# Altium PCB PCB.PcbDoc (part 2 of 2)
Units mm, origin at the board's own origin, x right, y up, seen from the top; angles counter-clockwise.
Board outline 135 x 105 mm, 2 copper layers (Top Layer, Bottom Layer); 93 components, 49 nets, 259 pads, 11 vias.
Unrouted connection lines stored in the file: 35.
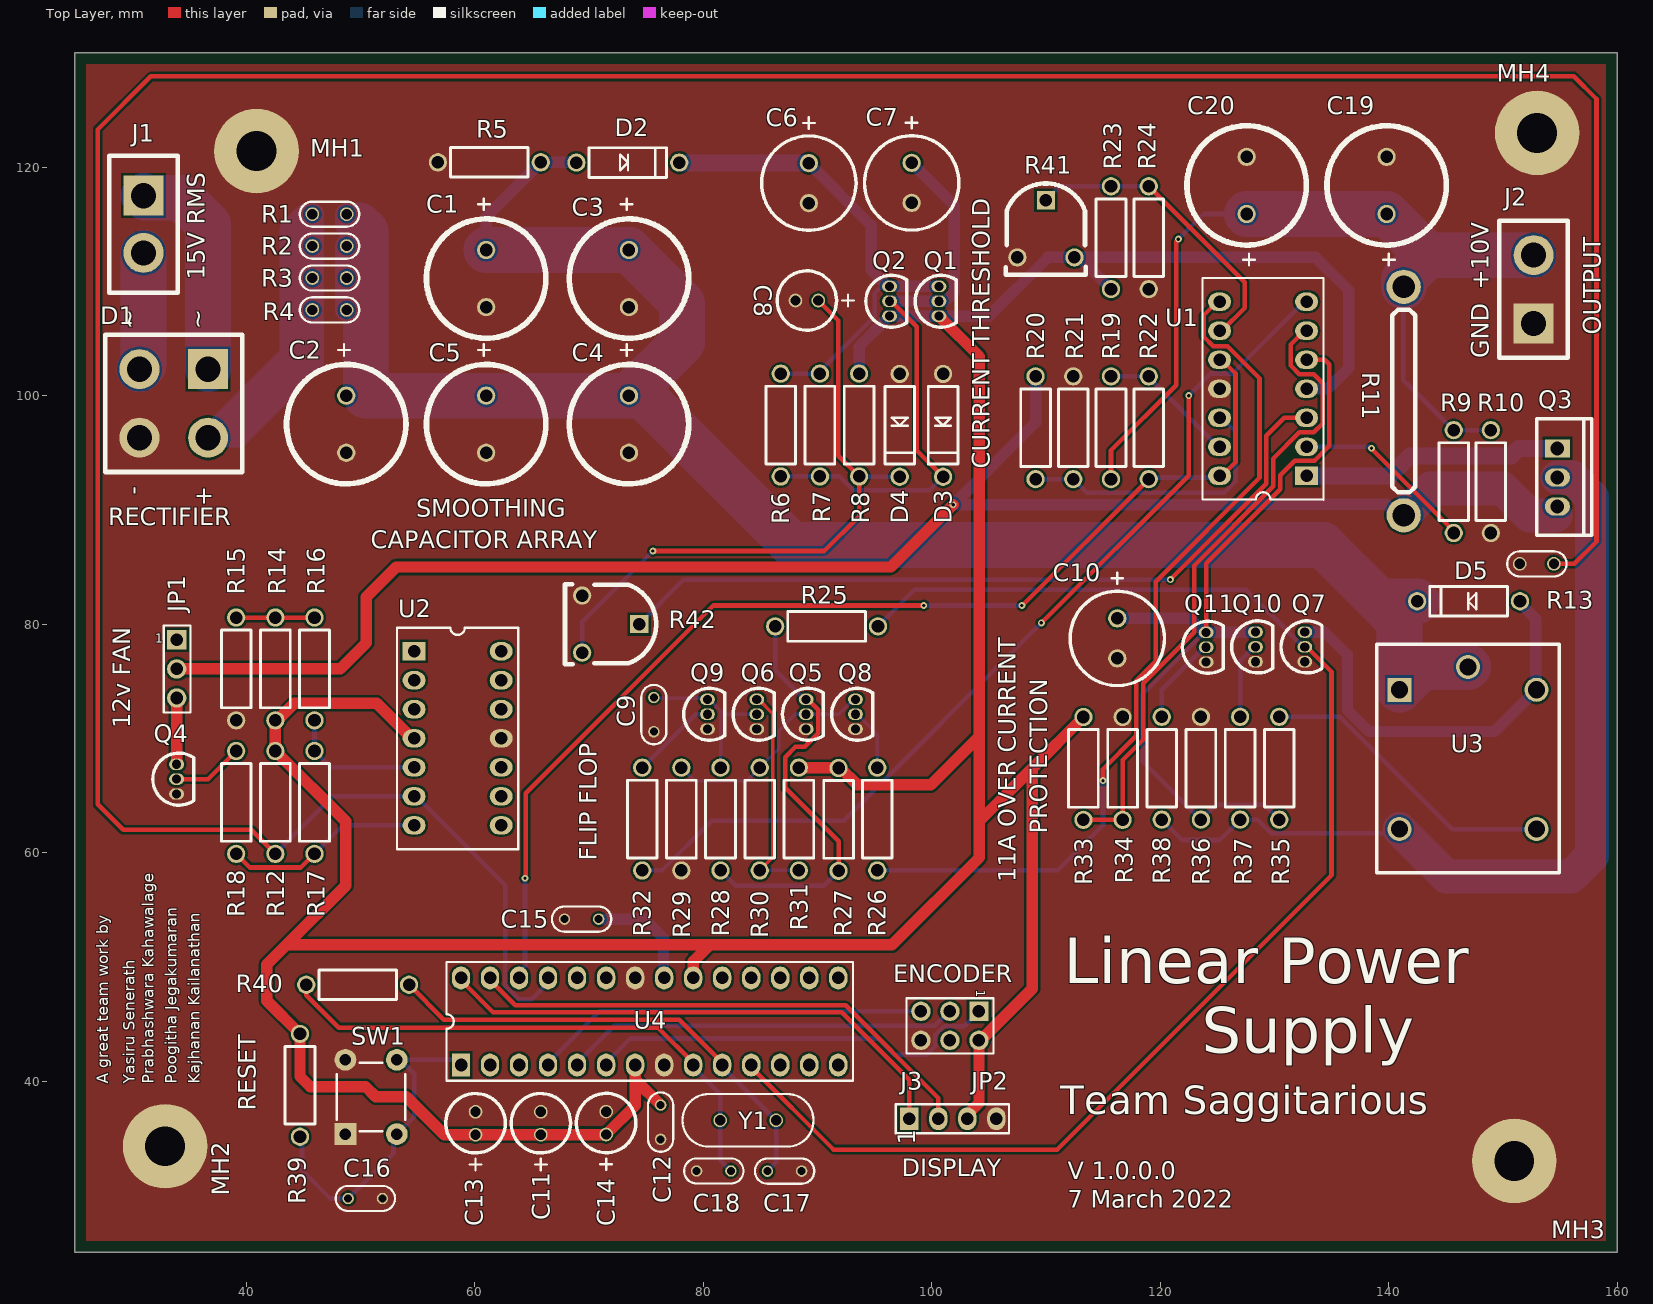
[diagram p0: Top Layer view]

## Part data (continued)
Y1: "Crystal 16MHz ±20ppm (Tol) ±30ppm (Stability) 18pF FUND 50Ohm 2-Pin Mini-CSMD T/R", Case/Package=CSMD, ESR (Equivalent Series Resistance)=50R, Frequency=16MHz, Frequency Stability=30ppm, Frequency Tolerance=20ppm, Load Capacitance=18pF, Manufacturer=Abracon, Max Operating Temperature=85°C, Min Operating Temperature=-40°C, Package Quantity=1000, Resistor Type=Ceramic, Supplier Part Number 1=1710290, Category=Crystals, ComponentLink1Description=https://datasheet.ciiva.com/15116/getdatasheetpartid-721624-15116835.pdf?src-supplier=Verical, ComponentLink1URL=https://datasheet.ciiva.com/15116/getdatasheetpartid-721624-15116835.pdf?src-supplier=Verical, ComponentLink2Description=https://datasheet.ciiva.com/22658/947971-22658293.pdf?src-supplier=Element14, ComponentLink2URL=https://datasheet.ciiva.com/22658/947971-22658293.pdf?src-supplier=Element14, ComponentLink3Description=https://datasheet.ciiva.com/5788/abm7-5788054.pdf?src-supplier=Farnell, ComponentLink3URL=https://datasheet.ciiva.com/5788/abm7-5788054.pdf?src-supplier=Farnell, ComponentLink4Description=https://datasheet.ciiva.com/7998/947971-7998600.pdf?src-supplier=Element14, ComponentLink4URL=https://datasheet.ciiva.com/7998/947971-7998600.pdf?src-supplier=Element14, ComponentLink5Description=https://datasheet.ciiva.com/46385/947971-46385243.pdf?src-supplier=Element14, ComponentLink5URL=https://datasheet.ciiva.com/46385/947971-46385243.pdf?src-supplier=Element14, ComponentLink6Description=https://datasheet.ciiva.com/16383/abm7-16383174.pdf?src-supplier=Future+Electronics, ComponentLink6URL=https://datasheet.ciiva.com/16383/abm7-16383174.pdf?src-supplier=Future+Electronics, ComponentLink7Description=https://datasheet.ciiva.com/18649/abm7-18649865.pdf?src-supplier=Digi-Key, ComponentLink7URL=https://datasheet.ciiva.com/18649/abm7-18649865.pdf?src-supplier=Digi-Key, ComponentLink8Description=https://datasheet.ciiva.com/18649/abm7-18649866.pdf?src-supplier=Digi-Key, ComponentLink8URL=https://datasheet.ciiva.com/18649/abm7-18649866.pdf?src-supplier=Digi-Key, ComponentLink9Description=https://datasheet.ciiva.com/18649/abm7-18649867.pdf?src-supplier=Digi-Key, ComponentLink9URL=https://datasheet.ciiva.com/18649/abm7-18649867.pdf?src-supplier=Digi-Key, ComponentLink10Description=https://datasheet.ciiva.com/26941/getdatasheetpartid-719818-26941724.pdf?src-supplier=Verical, ComponentLink10URL=https://datasheet.ciiva.com/26941/getdatasheetpartid-719818-26941724.pdf?src-supplier=Verical, Depth=3.5mm, Height=0.055inch, Lead Free="Lead Free", Length=6mm, Manufacturer Part Number=ABM7-16.000MHZ-D2Y-T, Mount="Surface Mount", Number of Pins=2, Packaging="Tape and Reel", Pricing 1="1000=0.52200, 3000=0.50800 (USD)", Radiation Hardening=No, REACH SVHC=Unknown, RoHS=Yes, Stock 1=710, Supplier 1=RSComponents, Termination=SMD/SMT, Tolerance=20ppm, Width=3.3mm

## Via types
v1: diameter 0.6, hole 0.3, Top Layer to Bottom Layer, 11 vias

## Nets (pads, with @x,y where several pads share a name; then routed paths per layer and width w, separated by ;. In a path a pad name is that pad's centre, name@x,y a point inside that pad or via, vN(x,y) a via of type N, cw(c..) or ccw(c..) an arc to the next point about the centre after c; other vN are vias at no path point)
10V_MOSFET: JP1.2 Q3.3 R11.2 R20.1 | length 145.6
  Top Layer w1: JP1.2 48.223,76.073 50.5,78.35 50.5,82.375 53.125,85 96.425,85 v1(101.875,90.45)
  Bottom Layer w1: v1(101.875,90.45) v1@101.9,90.45 ; R20.1 109.095,97.645 v1@101.9,90.45 ; R11.2 140.784,89.525 139.809,90.5 126.5,90.5 126.45,90.45 v1@101.9,90.45
  Bottom Layer w3: R11.2 143.675,91.875 149.975,91.875 152.35,89.5 154.6,89.5
10V_out: C19.1 C20.1 J2.1 R9.1 R10.1 R11.1 R19.1 | length 78.3
  Top Layer w0.4: R19.1 115.699,95.206 121.4,100.907 121.4,113.5 v1(121.6,113.7)
  Bottom Layer w0.4: v1(121.6,113.7) 123.8,115.9 C20.1 ; R11.1 141.3,109.5 141.3,101.334 141.534,101.1 141.575,101.1 R9.1 R10.1
  Bottom Layer w4: C20.1 C19.1 143.425,112.3 ; R11.1 141.325,110.2 143.425,112.3 ; J2.1 143.425,112.3
CurrentM: R22.1 U1.10 U1.14 U4.26 | length 100.3
  Top Layer w0.4: v1(64.4,57.75) 64.45,57.8 64.45,65.2 80.875,81.625 v1(99.3,81.625) ; v1(107.9,81.625) 107.937,81.625 R22.1 ; U1.14 125.4,92.975 126.6,94.175 126.6,101.935 125.4,103.135 U1.10
  Bottom Layer w0.4: U4.26 63.881,49.547 64.475,50.141 64.475,50.425 64.4,50.5 v1(64.4,57.75) ; v1(99.3,81.625) v1(107.9,81.625) ; R22.1 119.144,92.832 125.057,92.832 U1.14
FFC1: C9.2 Q6.2 Q9.3 R28.2 | length 14.6
  Bottom Layer w0.3: C9.2 75.761,73.492 80.29,73.492 Q9.3 80.525,73.407 81.518,72.414 ; R28.2 81.518,72.414 ; Q6.2 81.825,72.107 81.518,72.414
FFC2: Q5.2 Q8.3 R29.2 R30.2 | length 19.6
  Bottom Layer w0.3: R29.2 79.239,66.283 83.797,66.283 R30.2 86.6,69.086 86.6,70.65 88.057,72.107 Q5.2 91.879,72.107 93.179,73.407 Q8.3
GND: C1.2 C2.2 C3.2 C4.2 C5.2 C6.2 C7.2 C8.2 C9.1 C10.2 C11.2 C12.1 C13.2 C14.2 C15.1 C16.1 C17.2 C18.2 C19.2 C20.2 D1.1 D3.2 D4.2 J2.2 J3.6 JP2.4 MH1.1 MH2.1 MH3.1 MH4.1 Q4.1 Q5.1 Q6.1 Q7.1 Q8.1 Q9.1 Q10.1 Q11.1 R5.2 R10.2 R13.1 R15.2 R21.2 R24.1 R29.1 R34.1 R36.1 R41.2 R42.2 SW1.1 SW1.2 U1.11 U2.11 U4.8 U4.22
MainDC: C1.1 C2.1 C3.1 C4.1 C5.1 D2.2 D5.1 R1.2 R2.2 R3.2 R4.2 R5.1 U3.1 U3.5 | length 178.4
  Bottom Layer w1: C1.1 61,115.65 R5.1 65.787,120.412 68.888,120.412 D2.2
  Bottom Layer w2: R4.2 R3.2 R2.2 ; 48.786,114.925 R1.2
  Bottom Layer w4: 49.9,114.925 50.45,114.375 50.45,100 C5.1 C4.1 ; C1.1 C3.1 78.15,108.1 78.15,104.65 C4.1 ; D5.1 139.175,82 ; U3.5 142.95,76.25 U3.1 140.95,80.225 139.175,82 ; C4.1 74.725,100 87.8,86.925 134.25,86.925 139.175,82
MainDC_RELAY: Q3.2 R37.2 R38.2 U3.4 | length 77.4
  Bottom Layer w0.4: R38.2 121.924,61.1 125.218,61.1 R37.2 128.525,62.882 129.725,61.682 140.122,61.682 140.49,62.05 U3.4
  Bottom Layer w2.95: Q3.2 156.071,92.84
  Bottom Layer w3: U3.4 145.1,57.9 155.975,57.9 157.8,59.725 157.8,91.111 156.071,92.84
NetC6_1: C6.1 D2.1 Q1.3 Q2.3 R6.1 R7.1 | length 43.5
  Bottom Layer w0.4: R6.1 R7.1 90.217,102.138 95,106.921 95,108.966 95.481,109.446 96.198,109.446 Q2.3
  Bottom Layer w1: C6.1 94.7,114.9 94.7,111.024 96.163,109.561 Q2.3 Q1.3
  Bottom Layer w1.5: D2.1 77.927,120.4 77.977,120.35 C6.1
NetC7_1: C7.1 D3.1 Q1.2 Q2.2 R6.2 R7.2 | length 51.5
  Top Layer w0.4: Q2.2 96.463,108.261 98.708,106.016 98.708,95.192 D3.1
  Bottom Layer w0.4: R6.2 R7.2 91.949,92.924 93.173,91.7 99.8,91.7 D3.1
  Bottom Layer w1: Q2.2 Q1.2 101.178,108.261 101.981,109.064 101.981,116.644 C7.1
NetC8_1: C8.1 D4.1 R8.2 R42.3 | length 54.7
  Top Layer w0.4: v1(75.6,86.4) 90.6,86.4 93.646,89.446 R8.2 91.822,94.748 91.822,106.578 C8.1
  Bottom Layer w0.4: R42.3 69.4,80.2 v1(75.6,86.4) ; R8.2 93.658,92.912 97.188,92.912 D4.1
NetC15_2: C15.2 U4.21 | length 10.1
  Bottom Layer w1: C15.2 74.85,54.175 76.525,52.5 76.525,49.078 U4.21 U4.21@76.581,49.222
NetC16_2: C16.2 R39.1 SW1.3 SW1.4 U4.1 | length 28.9
  Bottom Layer w0.4: R39.1 44.875,34.953 44.875,32.175 47.332,29.718 C16.2 52.89,33.689 52.89,35.071 SW1.3 54.7,36.881 54.7,40.641 SW1.4@53.483,41.858 ; SW1.4 SW1.4@53.483,41.858 ; U4.1 58.345,41.858 SW1.4@53.483,41.858
NetC17_1: C17.1 R40.2 U4.10 Y1.2 | length 42
  Top Layer w0.4: R40.2 57.3,45.375 77.888,45.375 81.661,41.602 U4.10
  Bottom Layer w0.4: U4.10 81.661,41.242 86.344,36.559 Y1.2 86.383,32.908 85.621,32.146 C17.1
NetC18_1: C18.1 R40.1 U4.9 Y1.1 | length 48.1
  Top Layer w0.4: R40.1 45.25,47.525 48.097,44.678 76.045,44.678 79.121,41.602 U4.9
  Bottom Layer w0.4: U4.9@79.15,41.373 U4.9 79.121,41.202 81.483,38.84 Y1.1 81.483,33.067 C18.1
NetD1_3: D1.3 R1.1 R2.1 R3.1 R4.1 | length 48.3
  Bottom Layer w2: D1.3 D1.3@36.791,96.45 ; D1.3@36.791,96.45 43.925,103.584 43.925,114.55 45.259,115.884 R1.1 R2.1 R3.1 R4.1 45.786,102.961 39.275,96.45 D1.3@36.791,96.45
NetD5_2: D5.2 Q7.3 U3.2 | length 36.6
  Bottom Layer w1: Q7.3 134.398,79.302 136.4,77.3 136.4,72.486 138.286,70.6 149.3,70.6 U3.2 152.9,74.3 152.9,80.438 151.5,81.838 D5.2
NetJ3_1: J3.1 U4.6 | length 36.7
  Top Layer w0.4: U4.6 U4.6@71.501,41.602
  Bottom Layer w0.4: U4.6 71.501,41.602 73.624,43.725 95.325,43.725 96.739,42.311 99.578,42.311 100.33,43.063 100.33,44.059 101.082,44.811 102.85,44.811 J3.1
NetJ3_3: J3.3 U4.5 | length 34.7
  Bottom Layer w0.4: U4.5 68.961,41.602 72.21,44.851 100.274,44.851 101.524,46.101 J3.3
NetJ3_5: J3.5 U4.4 | length 34.7
  Bottom Layer w0.4: U4.4 66.421,41.602 70.92,46.101 J3.5
NetJP1_3: JP1.3 Q4.3 | length 5.8
  Top Layer w1: Q4.3 33.909,67.725 JP1.3
NetJP2_1: JP2.1 U4.28 | length 46.5
  Top Layer w0.4: U4.28 58.801,48.822 61.598,46.025 92.125,46.025 98.05,40.1 98.05,36.709 JP2.1
NetJP2_2: JP2.2 U4.27 | length 45.5
  Top Layer w0.4: U4.27 61.341,48.822 63.538,46.625 92.475,46.625 100.584,38.516 JP2.2
NetQ3_1: Q3.1 U1.1 | length 23
  Bottom Layer w1.5: U1.1 140.125,92.975 141.875,94.725 150.74,94.725 151.395,95.38 Q3.1
NetQ4_2: Q4.2 R18.2 | length 6.2
  Top Layer w0.4: Q4.2 36.652,66.425 R18.2
NetQ5_3: Q5.3 R25.1 R27.1 R28.1 | length 38.2
  Top Layer w0.4: Q5.3 89.161,73.407 90.061,72.507 90.061,70.434 88.877,69.25 88.075,69.25 87.176,68.351 87.176,65.664 91.85,60.99 R27.1
  Bottom Layer w0.4: R28.1 82.851,57.1 90.55,57.1 R27.1 ; R25.1 86.3,75.968 88.861,73.407 Q5.3
NetQ6_3: Q6.3 R30.1 R31.1 | length 19.5
  Top Layer w0.3: Q6.3 84.843,73.407 86.097,72.153 86.097,59.583 R30.1
  Bottom Layer w0.3: R30.1 R31.1
NetQ8_2: Q8.2 R26.1 | length 5.6
  Bottom Layer w0.3: Q8.2 93.479,72.107 95.234,70.352 R26.1
NetQ9_2: Q9.2 R32.1 | length 7.7
  Bottom Layer w0.4: R32.1 79.334,72.107 Q9.2
NetQ10_2: Q10.2 R37.1 | length 6.8
  Bottom Layer w0.4: R37.1 127,76.807 128.195,78.002 Q10.2
NetQ11_2: Q11.2 R38.1 | length 7.8
  Bottom Layer w0.4: R38.1 120.142,74.237 123.877,77.972 Q11.2
NetR9_2: R9.2 U1.2 | length 16.3
  Top Layer w0.4: v1(138.5,95.4) 138.5,95.346 145.7,88.146 R9.2
  Bottom Layer w0.4: U1.2@132.725,95.42 U1.2 138.285,95.515 138.4,95.4 v1(138.5,95.4)
NetR14_2: R14.2 R15.1 R16.1 | length 6.9
  Top Layer w0.4: R15.1 R14.2 R16.1
NetR16_2: R16.2 R17.1 U2.5 | length 12
  Bottom Layer w0.4: R16.2 R17.1 47.403,67.46 U2.5
NetR17_2: R17.2 R18.1 U2.7 | length 17.6
  Top Layer w0.4: R18.1 40.316,58.689 44.774,58.689 R17.2
  Bottom Layer w0.4: R17.2 48.465,62.38 U2.7
NetR19_2: R19.2 R22.2 U1.13 | length 12.1
  Bottom Layer w0.4: R19.2 R22.2 119.001,101.602 125.088,95.515 U1.13
NetR20_2: R20.2 R21.1 U1.12 | length 24.7
  Bottom Layer w0.4: R20.2 R21.1 113.597,91.489 125.611,91.489 126.6,92.478 126.6,96.855 125.4,98.055 U1.12
NetR23_1: R23.1 R24.2 R41.1 U1.9 | length 26.7
  Top Layer w0.4: R24.2 127.4,109.927 127.4,107.675 125.4,105.675 U1.9
  Bottom Layer w0.4: R41.1 111.226,118.326 R23.1 R24.2
NetR33_1: R33.1 R34.2 U1.6 | length 56.8
  Top Layer w0.4: R33.1 R34.2 116.713,68.101 118.513,69.901 118.513,74.813 122.977,79.277 122.977,85.128 129.9,92.051 129.9,94.492 132.193,96.785 133.447,96.785 134.22,97.558 134.22,101.092 133.447,101.865 132.193,101.865 131.42,102.638 131.42,104.475 132.62,105.675 U1.6
NetR35_2: R35.2 U3.3 | length 26.6
  Bottom Layer w0.4: R35.2 135.731,71.882 145.563,62.05 U3.3
NetR42_1: R42.1 U1.3 | length 68.4
  Top Layer w0.4: v1(120.9,83.9) 129.3,92.3 129.3,96.5 130.855,98.055 U1.3
  Bottom Layer w0.4: R42.1 78.3,83.9 v1(120.9,83.9)
Relay_Reset: R32.2 U1.7 | length 82.9
  Top Layer w0.4: v1(109.6,80.1) 122.5,93 v1(122.5,100)
  Bottom Layer w0.4: R32.2 76.392,58.433 80.758,62.799 92.297,62.799 109.598,80.1 v1(109.6,80.1) ; v1(122.5,100) 124.435,101.935 126.34,101.935 132.62,108.215 U1.7
Relay_Set: R26.2 U1.8 | length 76.4
  Top Layer w0.4: v1(115,66.3) 115,67.3 117.913,70.213 117.913,75.062 119.6,76.749 119.6,83.7 128.7,92.8 128.7,101.532 125.897,104.335 124.643,104.335 123.8,105.178 123.8,107.015 125,108.215 U1.8
  Bottom Layer w0.4: R26.2 111.033,58.433 115,62.4 v1(115,66.3)
RELAY_Transistor: Q7.2 R25.2 U4.11 | length 125.7
  Top Layer w0.4: U4.11 84.201,41.202 91.403,34 111,34 135,58 135,75.815 132.813,78.002 Q7.2
  Bottom Layer w0.4: R25.2 98.5,83 127.515,83 132.513,78.002 Q7.2
SecPow: C11.1 C12.2 C13.1 C14.1 J3.2 JP2.3 Q1.1 Q2.1 R8.1 R12.2 R14.1 R23.2 R27.2 R31.2 R33.2 R39.2 R41.3 U1.4 U2.4 U4.7 U4.20 | length 336.8
  Top Layer w1: U2.4 54.49,70 51.417,73.073 44.207,73.073 42.707,71.573 R14.1 R12.2 48.7,62.734 48.7,57.1 43.525,51.925 ; U4.7 74.041,40.075 ; C12.2 74.1,40.075 74.041,40.075 ; U4.20 79.125,49.026 79.125,50.475 80.575,51.925 ; R31.2 88.393,67.417 91.833,67.417 R27.2 92.012,67.4 93.479,65.933 99.933,65.933 104.175,70.175 ; Q1.1 100.781,106.961 100.781,106.811 104.175,103.417 104.175,70.175 ; JP2.3 103.124,37.065 104.14,38.081 J3.2 104.29,43.561 108.806,48.077 108.806,67.387 ; R33.2 108.806,67.387 ; 43.525,51.925 80.575,51.925 ; 43.525,51.925 41.8,50.2 41.8,47.028 R39.2 44.7,44.12 44.7,40.4 45.587,39.513 50.437,39.513 51.325,38.625 54.011,38.625 57.33,35.306 C13.1 60.079,35.314 71.493,35.314 C14.1 74.041,37.862 74.041,40.075 ; 80.575,51.925 96.525,51.925 104.175,59.575 104.175,62.756 ; 104.175,62.756 104.175,70.175 ; 104.175,62.756 108.806,67.387
  Bottom Layer w1: R8.1 93.646,104.294 96.163,106.811 96.163,106.961 Q2.1 Q1.1 105.036,106.961 110.175,112.1 R41.3 ; R23.2 113.04,111.985 112.615,111.985 R41.3 ; U1.4 132.825,100.6 134.675,100.6 136.525,102.45 136.525,109.2 133.625,112.1 R41.3
Temp: R12.1 R13.2 U2.6 U4.25 | length 293.1
  Top Layer w0.4: R12.1 40.434,62 29.225,62 27,64.225 27,123.3 31.65,127.95 156.216,127.95 158.2,125.966 158.2,87.225 156.25,85.275 R13.2
  Bottom Layer w0.4: R12.1 47.576,64.92 U2.6 54.89,64.92 62.675,57.135 62.675,48.331 63.856,47.15 64.975,47.15 66.421,48.596 U4.25
Timer_out: C10.1 Q10.3 Q11.3 R35.1 R36.2 U1.5 | length 72.4
  Top Layer w0.4: Q11.3 124.027,85.33 130.5,91.803 130.5,93.021 131.794,94.315 133.517,94.315 134.82,95.618 134.82,102.735 134.42,103.135 U1.5
  Bottom Layer w0.4: Q11.3 123.877,79.272 118.5,73.895 118.5,67.953 R36.2 124.889,64.2 129.111,64.2 R35.1
  Bottom Layer w1: C10.1 122.649,80.5 Q11.3@123.877,79.272 ; Q11.3 124.177,79.272 124.207,79.302 Q10.3
Trans1: D1.2 J1.1 | length 10.3
  Bottom Layer w4: D1.2 31,102.659 J1.1
Trans2: D1.4 J1.2 | length 19.4
  Bottom Layer w4: J1.2 31.175,117.325 34.312,117.325 36.655,114.982 D1.4
pads on no net: J3.4 JP1.1 U2.1 U2.2 U2.3 U2.8 U2.9 U2.10 U2.12 U2.13 U2.14 U4.2 U4.3 U4.12 U4.13 U4.14 U4.15 U4.16 U4.17 U4.18 U4.19 U4.23 U4.24

## Polygon pours and split planes (outlines as drawn)
GND on Top Layer "GroundPourL2" (solid, pour order 1): 159,129 26,129 26,26 159,26
GND on Bottom Layer "GroundPourL2" (solid, pour order 2): 26,26 159,26 159,129 26,129

## Silkscreen, mask and mechanical layers (free items; w line width, h text height)
Top Overlay:
  text "15V RMS" at 36.35,110.15 h1.52 r90
  text "OUTPUT" at 158.575,105.325 h1.52 r90
  text "CURRENT THRESHOLD" at 105.1,93.6 h1.52 r90
  text "SMOOTHING" at 54.9,89.4 h1.52
  text "RECTIFIER" at 27.9,88.65 h1.52
  text "CAPACITOR ARRAY" at 50.9,86.65 h1.52
  text "12v FAN" at 29.85,70.9 h1.52 r90
  text "PROTECTION" at 110.1,61.65 h1.52 r90
  text "FLIP FLOP" at 70.675,59.275 h1.52 r90
  text "11A OVER CURRENT" at 107.35,57.4 h1.52 r90
  text "ENCODER" at 96.65,48.65 h1.52
  text "Linear Power" at 111.55,48.55 h4
  text "Supply" at 123.65,42.483 h4
  text "A great team work by" at 27.913,39.754 h1 r90
  text "Yasiru Senerath" at 30.246,39.754 h1 r90
  text "Prabhashwara Kahawalage" at 31.913,39.754 h1 r90
  text "Poogitha Jegakumaran" at 33.913,39.754 h1 r90
  text "Kajhanan Kailanathan" at 35.913,39.754 h1 r90
  text "RESET" at 40.85,37.4 h1.52 r90
  text "Team Saggitarious" at 111.25,37.083 h2.5
  text "DISPLAY" at 97.4,31.65 h1.52
  text "V 1.0.0.0" at 111.9,31.4 h1.52
  text "7 March 2022" at 111.9,28.9 h1.52
Bottom Overlay:
  text "Linear Power Supply" at 145.85,51.891 h3.8
  text "Max input: 17V RMS" at 146,47.133 h1.9
  text "Nominal input: 15V RMS" at 146,43.133 h1.9
  text "Max output: 10V 10A" at 146,39.133 h1.9
  text "Version 1.0.0.0" at 146,34.5 h1.9
  text "Release Date: 08-03-2022" at 146,30.5 h1.9
Bottom Paste:
  lines w2: 36.655,96.314 36.664,96.314 43.95,103.6 ; 37,96.45 39.275,96.45 45.786,102.961 45.786,115.884 ; 48.786,107.502 48.786,113.09 ; 48.786,115.884 48.786,114.939 48.85,114.875
  lines w2.03: 43.95,103.6 43.95,114.55 45.284,115.884
  lines w3: 141.325,89.525 143.675,91.875 149.975,91.875 152.35,89.5 154.6,89.5 ; 154.775,92.84 156.085,92.84 157.8,91.125 157.8,59.725 155.975,57.9 145.1,57.9 140.95,62.05 ; 140.95,62.05 140.95,62.05
  lines w4: 30.655,102.314 31,102.659 31,112.5 ; 31,117.5 31.175,117.325 34.325,117.325 36.655,114.995 36.655,102.314 ; 49.9,114.925 50.45,114.375 50.45,100 ; 61,112.75 73.5,112.75 78.15,108.1 78.15,104.65 73.5,100 ; 127.575,115.9 139.825,115.9 143.425,112.3 152.775,112.3 ; 140.925,80.25 134.25,86.925 ; 141.325,109.525 141.325,110.2 143,111.875 ; 146.95,76.25 142.95,76.25 140.95,74.25 140.95,80.45 142.5,82 139.175,82 134.25,86.925 ; 50.45,100 50.45,100 ; 50.45,100 73.5,100 ; 73.5,100 74.725,100 87.8,86.925 134.25,86.925
Bottom Solder:
  lines w2.25: 43.925,103.9 43.925,104.825 43.925,114.575 45.234,115.884 45.786,115.884 45.786,102.986 39.225,96.425 37.55,96.425 37.8,96.675 37.8,97.473 44.25,103.923 44.25,114.45 ; 48.786,107.502 48.786,113.09 ; 48.786,114.861 48.786,115.884
  lines w3: 154.6,89.5 155.325,90.225
  lines w3.05: 156.06,92.84 157.75,91.15
  lines w3.06: 154.775,92.84 156.06,92.84
  lines w3.2: 152.35,89.5 154.6,89.5 ; 155.325,90.225 156.075,90.225
  lines w3.25: 140.95,62.05 140.95,62.025 145.075,57.9 155.975,57.9 157.8,59.725 157.8,90.85 157.75,90.9 ; 141.325,89.525 143.675,91.875 149.975,91.875 152.35,89.5
  lines w3.9: 127.575,115.9 139.825,115.9 143.225,112.5 ; 141.325,109.525 141.325,110.2 143.425,112.3 152.7,112.3
  lines w4.25: 30.655,102.314 31,102.659 31,112.5 ; 31,117.5 31.175,117.325 34.325,117.325 36.655,114.995 36.655,102.314 ; 49.9,114.925 50.45,114.375 50.45,100 ; 61,112.75 73.5,112.75 78.15,108.1 78.15,104.65 73.5,100 ; 142.5,82 139.75,82 ; 146.95,76.25 142.95,76.25 140.95,74.25 140.95,80.2 134.225,86.925 87.8,86.925 74.725,100 61,100 50.45,100 ; 50.45,100 50.45,100 ; 139.75,82 139.75,82
BoartOutline:
  the board outline again, w0.2

## Text inside footprints (layer, text, board x,y; h text height)
D1: Top Overlay "-" at 29.647,92.06 h1.52 r270; Top Overlay "+" at 35.655,92.06 h1.52 r270; Top Overlay "~" at 29.139,107.56 h1.52 r270; Top Overlay "~" at 35.139,107.56 h1.52 r270
J2: Top Overlay "GND" at 148.746,103.254 h1.52 r90; Top Overlay "+10V" at 148.746,109.254 h1.52 r90
J3: Top Overlay "1" at 103.911,47.981 h0.76 r270
JP1: Top Overlay "1" at 32.029,78.384 h0.76
JP2: Top Overlay "1" at 98.552,34.417 h1.52 r90